# Altium PCB Passive-buzzer-module-PCB_2025-10-18.pcbdoc
Units mm, origin at the board's own origin, x right, y up, seen from the top; angles counter-clockwise.
Board outline 61.53 x 39.37 mm, 2 copper layers (Top Layer, Bottom Layer); 4 components, 6 nets, 11 pads, 3 vias.
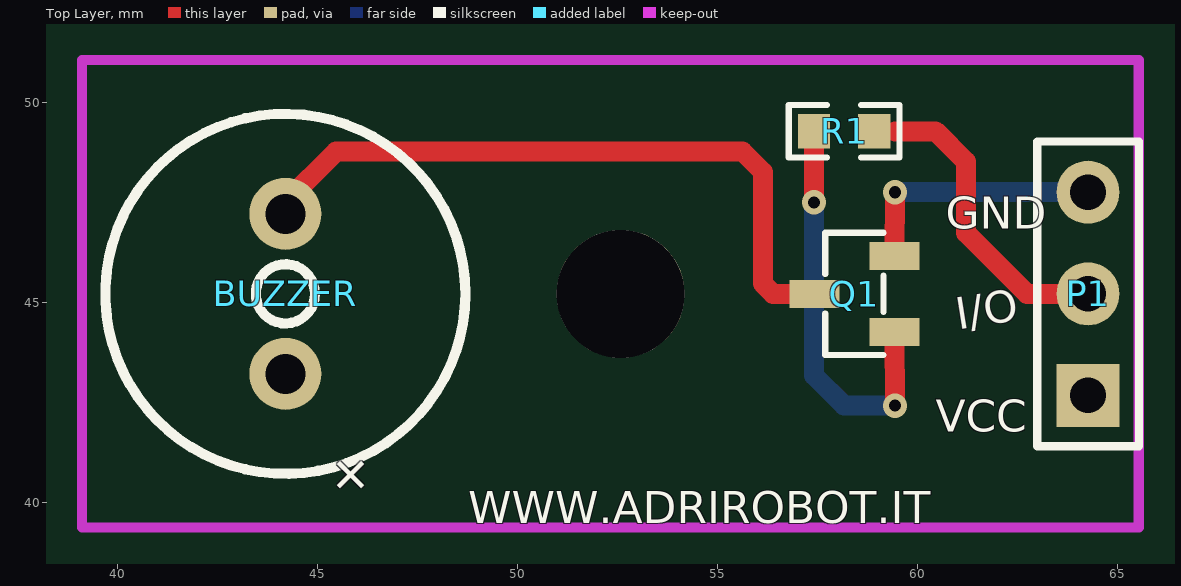
[diagram p0: Top Layer view]
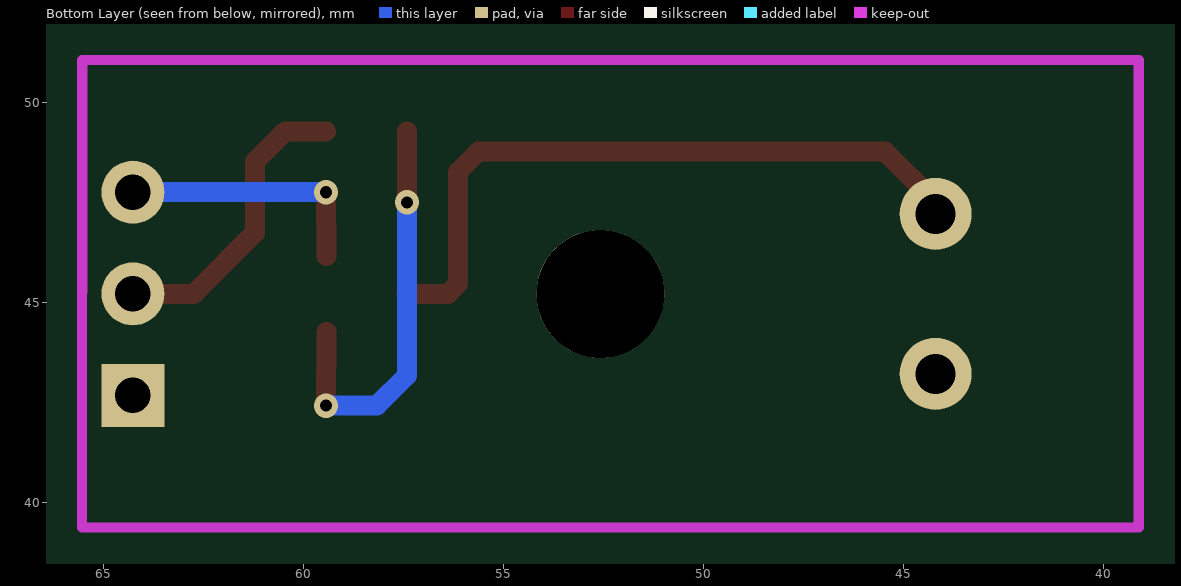
[diagram p1: Bottom Layer view, seen from below]

## Layer stack, top to bottom
Top Layer: signal copper (thickness not stored)
Dielectric: dielectric 0.32, FR-4, Dk 4.8
Bottom Layer: signal copper (thickness not stored)

## Board outline
86.93,25.4 25.4,25.4 25.4,64.77 86.93,64.77

## Components (designator, comment, footprint, x,y, rotation, side; value= is the part's Value field where it differs from the comment)
BUZZER "QMB-09B-03" BUZ-TH_BD9.0-P4.00-D0.6-FD 44.196,45.212 r90 top
P1 "Header-Male-2.54_1x3" HDR-3X1/2.54 64.262,45.212 r90 top
Q1 "S8050 J3Y" SOT-23-3_L2.9-W1.3-P1.90-LS2.4-BR 58.42,45.212 r0 top
R1 "1k" R0603 58.166,49.276 r180 top

## Footprints (in the part's own frame and the unit in brackets; to place one, negate y for a bottom-side part, rotate by r counter-clockwise, add the part's x,y. Pads: shape width x height; smd on the part's side, far side on the other; paste and mask are expansions set on the pad)
BUZ-TH_BD9.0-P4.00-D0.6-FD [mm]
  round 1.8 hole 1 paste+0 mask+0.051: 1(-2,0) 2(2,0)
  silkscreen extent -4.5,-4.5 4.5,4.5
HDR-3X1/2.54 [mil]
  rect 62x62 hole 35 paste+0 mask+4: 1(-100,0)
  round 62 hole 35 paste+0 mask+4: 2(0,0) 3(100,0)
  silkscreen extent -150,-50 150,50
R0603 [mm]
  rect 0.806x0.864 smd paste-100 mask+0.051: 1(-0.753,0) 2(0.753,0)
  silkscreen extent -1.39,-0.66 1.39,0.66
SOT-23-3_L2.9-W1.3-P1.90-LS2.4-BR [mm]
  rect 1.25x0.7 smd paste+0 mask+0.051: 1(1,-0.95) 2(1,0.95) 3(-1,0)
  silkscreen extent -0.73,-1.53 0.73,1.53

## Free pads (board coordinates)
  round 3.2 hole 3.2 unplated paste+0: ""(52.578,45.212)

## Via types
v1: diameter 0.61, hole 0.305, Top Layer to Bottom Layer, tented both sides, 3 vias

## Nets (pads, with @x,y where several pads share a name; then routed paths per layer and width w, separated by ;. In a path a pad name is that pad's centre, name@x,y a point inside that pad or via, vN(x,y) a via of type N, cw(c..) or ccw(c..) an arc to the next point about the centre after c; other vN are vias at no path point)
$BOARDOUTLINENET: 
BUZZER_2: BUZZER.2 Q1.3 | length 17.1
  Top Layer w0.5: BUZZER.2 44.196,47.498 45.466,48.768 55.626,48.768 56.134,48.26 56.134,45.466 56.388,45.212 Q1.3
GND: P1.3 Q1.2 | length 6.4
  Top Layer w0.5: Q1.2 v1(59.436,47.752)
  Bottom Layer w0.5: v1(59.436,47.752) P1.3
I/O: P1.2 R1.1 | length 7.6
  Top Layer w0.5: 59.436,49.276 60.452,49.276 61.214,48.514 61.214,46.736 62.738,45.212 P1.2
Q1_1: Q1.1 R1.2 | length 10.3
  Top Layer w0.5: v1(57.413,47.498) R1.2 ; Q1.1 v1(59.436,42.418)
  Bottom Layer w0.5: v1(57.413,47.498) 57.413,43.171 58.166,42.418 v1(59.436,42.418)
VCC: BUZZER.1 P1.1

## Polygon pours and split planes (outlines as drawn)
VCC on Bottom Layer (solid): 38.1,52.07 67.564,52.07 67.818,51.816 67.818,38.608 68.072,38.354 38.354,38.354 38.1,38.1

## Silkscreen, mask and mechanical layers (free items; w line width, h text height)
Top Overlay:
  text "GND" at 60.706,46.844 h0.8
  text "I/O" at 61.023,44.309 h0.8 r9
  text "VCC" at 60.452,41.764 h0.8
  text "WWW.ADRIROBOT.IT" at 48.768,39.478 h0.8

## Text inside footprints (layer, text, board x,y; h text height)
BUZZER: Top Overlay "+" at 45.112,40.794 h1 r315